# Altium PCB PCB2.PcbDoc (part 3 of 3)
Units mm, origin at the board's own origin, x right, y up, seen from the top; angles counter-clockwise.
Board outline 98.9 x 50 mm, 4 copper layers (Top Copper, Signal Layer 1, Signal Layer 2, Bottom Copper), stack 1.564 mm thick; 154 components, 109 nets, 647 pads, 921 vias.
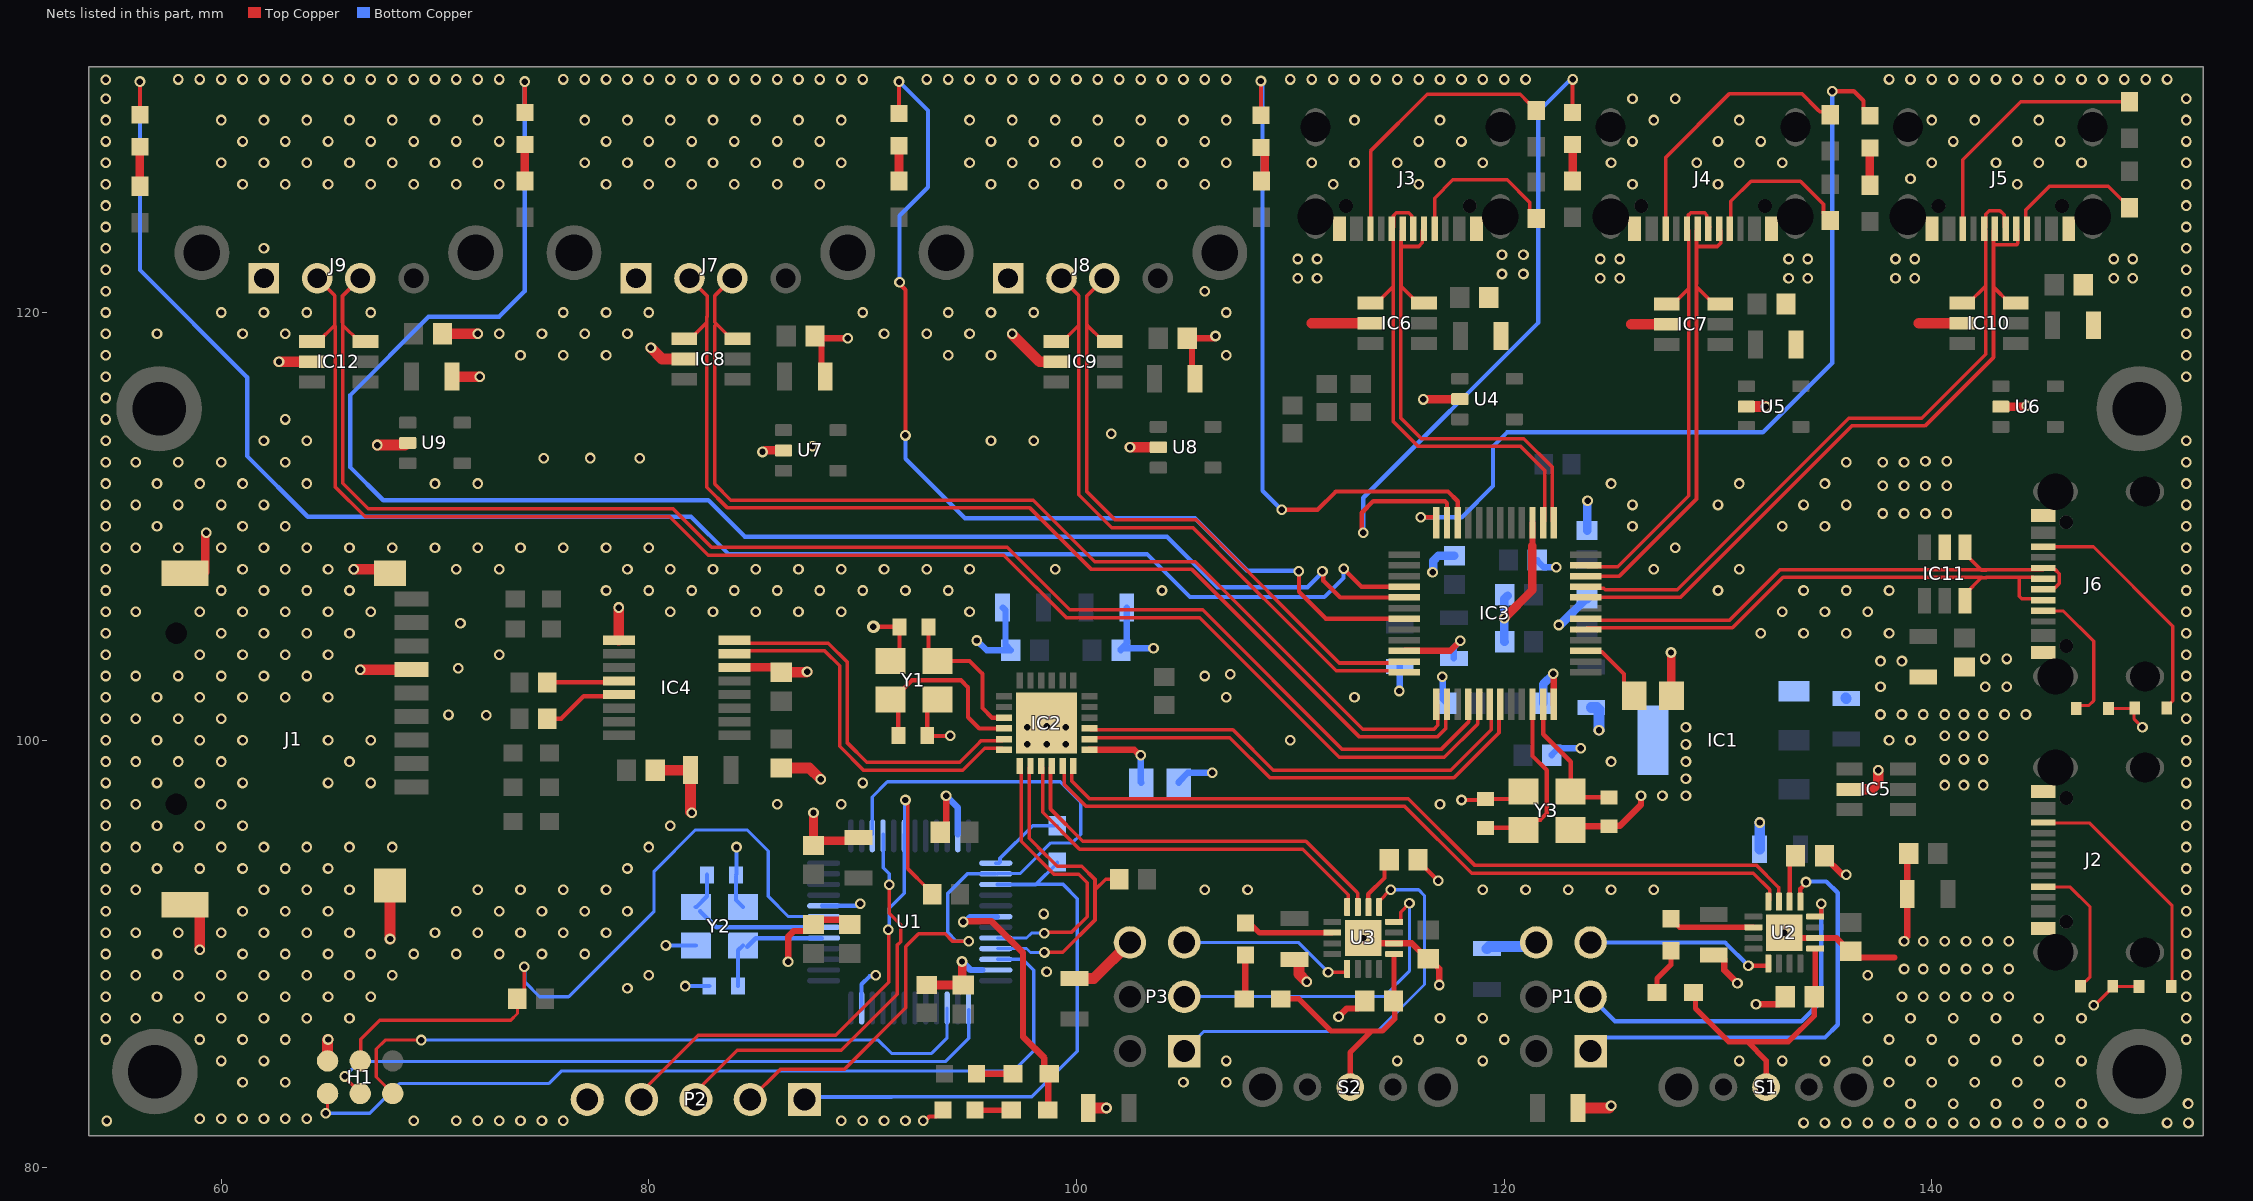
[diagram p4: the nets of this part, all layers, seen from the top]

## Via types
v1: diameter 0.5/0.5/0.5/0.5 (per signal layer), hole 0.3, Top Copper to Bottom Copper, tented both sides, 720 vias
v2: diameter 0.5, hole 0.3, Top Copper to Bottom Copper, tented both sides, 197 vias
v3: diameter 0.5, hole 0.3, Top Copper to Bottom Copper, 3 vias
v4: diameter 0.6/0.6/0.6/0.6 (per signal layer), hole 0.3, Top Copper to Bottom Copper, tented both sides, 1 vias

## Nets (pads, with @x,y where several pads share a name; then routed paths per layer and width w, separated by ;. In a path a pad name is that pad's centre, name@x,y a point inside that pad or via, vN(x,y) a via of type N, cw(c..) or ccw(c..) an arc to the next point about the centre after c; other vN are vias at no path point) (continued)
GND: C1.1 C2.1 C3.1 C4.1 C5.1 C6.1 C7.1 C8.1 C9.1 C10.2 C11.2 C12.1 C13.2 C14.1 C15.2 C16.1 C17.2 C18.1 C19.1 C20.1 C21.1 C22.1 C23.1 C24.1 C25.2 C26.1 C27.1 C28.1 C29.1 C30.1 C31.1 C32.1 C33.1 C34.1 C35.1 C36.2 C37.2 C38.2 C39.2 C40.2 C41.2 C42.2 C43.2 C44.2 C45.1 C46.1 C47.1 C48.1 C49.1 C50.1 C51.1 C52.1 C53.1 C54.1 C55.1 C56.1 C57.1 C58.1 C59.1 C60.1 C61.1 C62.1 D4.2 H1.3 IC1.1 IC1.4 IC2.25 IC3.10 IC3.24 IC3.39 IC4.1 IC4.14 IC5.5 IC6.5 IC7.5 IC8.5 IC9.5 IC10.5 IC11.5 IC12.5 J1.6 J1.G1 J1.G2 J1.G3 J1.G4 J2.A1-B12 J2.B1-A12 J3.A1-B12 J3.B1-A12 J4.A1-B12 J4.B1-A12 J5.A1-B12 J5.B1-A12 J6.A1-B12 J6.B1-A12 J7.1 J8.1 J9.1 P1.6 P2.5 P3.6 R1.2 R7.1 R10.2 R28.1 R33.1 R36.1 R37.1 U1.8 U1.23 U1.35 U1.47 U2.2 U2.17 U3.2 U3.17 U4.2 U5.2 U6.2 U7.2 U8.2 U9.2 Y1.2 Y1.4 Y2.2 Y2.4 Y3.2 Y3.4 | length 169.5
  Top Copper w0.149: v1(147.569,87.6) 147.611,87.6 148.453,88.442 R28.1@148.453,88.492 148.464,88.481 R33.1@149.692,88.481 ; R36.1@148.258,101.481 R37.1@149.572,101.481 ; R37.1@149.448,101.469 149.448,101.011 v1(149.848,100.611)
  Top Copper w0.166: R37.1@149.572,101.481 R37.1@149.593,101.502
  Top Copper w0.2: v4(90.5,105.3) C11.2@91.725,105.3 91.725,104.125 Y1.4@91.3,103.7 ; v1(92.839,82.201) 92.92,82.201 93.119,82.4 93.45,82.4 D4.2@93.75,82.7 ; Y1.2@93.5,101.9 93.018,101.418 C13.2@93.018,100.218 93.036,100.2 v1(94.1,100.2) ; C21.1@115.975,94.4 116.056,94.319 116.056,94.269 116.9,93.425 v1(116.922,93.425) ; v1(118.006,97.2) 119.075,97.2 C30.1@119.125,97.25 120.55,97.25 Y3.4@120.9,97.6
  Top Copper w0.3: v1(86.511,89.64) 86.511,90.236 ; 86.511,90.294 86.511,90.811 86.775,91.075 87.4,91.075 C5.1@87.7,91.375 ; C56.1@87.775,118.9 C56.1@87.875,118.8 ; C5.1@87.932,91.6 C6.1@89.632,91.6 ; C55.1@88.25,117 88.075,117.175 88.075,118.6 C56.1@87.875,118.8 ; v1(89.3,118.8) C56.1@87.875,118.8 ; C7.1@93.625,95.7 93.9,95.975 v1(93.9,97.4) ; C59.1@105.55,116.9 105.4,117.05 105.4,118.575 C60.1@105.175,118.8 106.4,118.8 v1(106.5,118.9) ; v1(112.255,87.068) 112.637,87.45 113.175,87.45 113.475,87.75 C25.2@113.475,87.8 ; v1(113.405,90.75) 113.655,90.5 U3.2@114.85,90.5 115.675,90.5 C24.1@116.4,89.775 ; IC3.10@115.337,104.175 117.475,104.175 v1(117.951,104.651) ; C24.1@116.45,89.775 116.5,89.775 116.969,89.306 v1(116.969,88.552) ; 121.3,109.1 121.325,109.125 IC3.39@121.325,110.163 ; v1(122.3,103.1) 122.325,103.075 IC3.24@122.325,101.687 ; Y3.2@123.1,95.8 123.275,95.975 C31.1@124.9,95.975 124.915,95.99 125.404,95.99 126.4,96.986 v1(126.4,97.4) ; C18.1@129.8,89.95 130.1,89.95 130.3,89.75 130.3,89.239 v1(130.909,88.63) ; v1(131.775,87.654) 132.85,87.654 133.15,87.954 C15.2@133.15,88 ; v1(133.1,91) 133.35,90.75 U2.2@134.545,90.75 135.525,90.75 136.15,90.125 C14.1@136.2,90.125 136.49,89.835 138.248,89.835 ; C12.1@134.975,94.6 134.975,94.55 135.787,93.738 135.962,93.738 v1(136,93.7) ; v1(138.7,90.6) 138.7,90.654 138.85,90.804 C48.1@138.85,92.8 138.85,94.625 C47.1@138.925,94.7
  Top Copper w0.4: J1.G3@59.25,107.85 59.25,109.65 v1(59.3,109.7) ; J1.G2@67.9,108 J1.G2@68.45,107.45 ; IC4.14@84,103.402 C32.1@85.898,103.402 ; v1(85.315,113.479) 85.369,113.479 85.44,113.55 U7.2@86.3,113.55 ; v1(87.7,96.6) C4.1@87.7,95.075 87.925,95.3 89.65,95.3 C3.1@89.8,95.45 ; R7.1@93,88.55 C8.1@94.7,88.55 94.664,88.586 94.664,89.63 v1(94.645,89.649) ; v1(116.209,115.934) 116.218,115.942 117.905,115.942 U4.2@117.919,115.956 ; v1(120,105.7) 121.306,107.006 121.306,109.094 ; v1(127.8,104.1) 127.813,104.088 127.813,102.087 R10.2@127.825,102.075 ; U6.2@143.225,115.6 144.369,115.6 144.414,115.646 v1(144.441,115.646)
  Top Copper w0.5: J1.G4@58.3,92.3 58.65,92.3 59,91.95 v1(59,90.2) ; v1(62.703,117.692) 62.712,117.7 IC12.5@64.25,117.7 ; H1.3@64.976,85 64.976,85.976 v1(65,86) ; v1(66.2,108) J1.G2@67.9,108 ; v1(66.5,103.3) J1.6@68.9,103.3 ; v1(67.3,113.8) 68.6,113.8 68.7,113.9 U9.2@68.725,113.9 ; v1(67.9,90.7) J1.G1@67.9,93.2 ; C62.1@70.35,119 v1(72,119) ; C61.1@70.8,117 v1(72.1,117) ; IC4.1@78.6,104.672 v1(78.6,106.2) ; v1(80.098,118.345) 80.618,117.825 IC8.5@81.65,117.825 ; C46.1@80.3,98.6 C33.1@81.95,98.6 81.95,96.65 v1(82,96.6) ; C45.1@86.2,98.7 87.5,98.7 v1(88.033,98.167) ; C32.1@86.2,103.175 87.375,103.175 v1(87.4,103.2) ; v1@97,118.974 98.274,117.7 IC9.5@99.05,117.7 ; C28.1@99.9,88.85 100.81,88.85 P3.6@102.5,90.54 ; C29.1@100.55,82.8 v1(101.4,82.8) ; v1(102.5,113.7) U8.2@103.825,113.7 ; C27.1@110.2,89.75 110.308,89.75 110.408,89.65 110.408,89.061 v1(110.774,88.695) ; 111,119.5 IC6.5@113.75,119.5 ; C20.1@123.45,82.8 124.9,82.8 v1(125,82.9) ; 125.95,119.45 IC7.5@127.6,119.45 ; U5.2@131.325,115.6 132.231,115.6 v1(132.244,115.586) ; IC5.5@136.15,97.7 137.192,97.7 137.5,98.008 v1(137.5,98.6) ; 139.4,119.5 IC10.5@141.425,119.5
  Bottom Copper w0.2: v1(80.8,90.4) Y2.4@82.2,90.4 ; v1(81.7,88.5) C22.1@82.825,88.5 ; C23.1@84.075,93.613 84.075,92.525 Y2.2@84.4,92.2 ; C23.1@84.075,93.7 84.1,93.725 v1(84.1,95) ; U1.8@88.1,92.25 89.705,92.25 89.805,92.35 v1(89.886,92.35) ; U1.47@89.95,87.4 U1.47@89.95,87.475 89.95,88.584 90.321,88.955 90.559,88.955 v1(90.606,89.001)
  Bottom Copper w0.3: v1(93.9,97.4) 94.45,96.85 U1.23@94.45,95.6 ; v1(94.645,89.649) 95.044,89.25 U1.35@95.6,89.25 ; v1(95.338,104.662) 95.8,104.2 C10.2@96.925,104.2 96.679,104.446 96.679,106.071 C9.1@96.55,106.2 ; C17.2@102.075,104.2 102.175,104.3 v1(103.6,104.3) ; C17.2@102.075,104.25 102.35,104.525 C16.1@102.35,106.2 ; R1.2@104.775,98 104.775,98.044 105.2,98.469 v1(106.347,98.469) ; v1(115.1,102.3) 115.114,102.314 C26.1@115.114,103.448 ; v1(117.111,102.973) 117.118,102.966 117.118,101.932 C36.2@117.325,101.725 ; C34.1@117.65,103.825 117.65,104.35 v1(117.951,104.651) ; C41.2@121.55,108.425 121.55,108.384 121.85,108.084 v1(122.437,108.084) ; C42.2@122.225,99.3 122.225,99.316 122.525,99.616 v1(123.574,99.616)
  Bottom Copper w0.4: v1(116.652,107.851) 116.69,107.889 116.69,108.391 116.928,108.629 117.671,108.629 C43.2@117.675,108.625 ; C38.2@120.025,104.6 120.013,104.613 120.013,105.687 v1(120,105.7) 120.012,105.712 120.012,106.612 C40.2@120.158,106.758 ; C39.2@121.825,101.725 121.825,102.625 v1(122.3,103.1) ; v1(122.546,105.387) 122.584,105.425 122.65,105.425 123.825,106.6 C44.2@123.875,106.6 ; C37.2@123.875,109.8 123.888,109.812 123.888,111.188 v1(123.9,111.2)
  Bottom Copper w0.5: C19.1@119.2,90.25 119.3,90.35 121.31,90.35 P1.6@121.5,90.54 ; C35.1@124.075,101.525 124.334,101.525 124.434,101.425 v1(124.434,100.467) ; C1.1@131.95,94.9 v1(131.95,96.15) ; C2.1@135.979,101.971 C2.1@136,101.95
  other v1: 139,83 141,83 143,83 145,83 147,83 61,84 63,84 105,84 107,84 138,84 140,84 142,84 144,84 146,84 60,85 62,85 107,85 115,85 119,85 131,85 133,85 135,85 137,85 139,85 141,85 143,85 145,85 147,85 59,86 61,86 63,86 116,86 118,86 120,86 138,86 140,86 142,86 144,86 146,86 56,87 58,87 60,87 62,87 64,87 66,87 117,87 119,87 137,87 139,87 141,87 143,87 145,87 147,87 57,88 59,88 61,88 63,88 65,88 67,88 138.6,88 139.6,88 140.6,88 141.6,88 142.6,88 143.6,88 79,88.404 56,89 58,89 60,89 62,89 64,89 66,89 68,89 80,89 137,89 138.7,89.3 139.6,89.3 140.6,89.3 141.6,89.3 142.6,89.3 143.6,89.3 57,90 61,90 63,90 65,90 67,90 69,90 71,90 73,90 75,90 77,90 139.6,90.6 140.6,90.6 141.6,90.6 142.6,90.6 143.6,90.6 56,91 58,91 60,91 62,91 64,91 66,91 70,91 72,91 74,91 76,91 78,91 61,92 63,92 65,92 71,92 73,92 75,92 77,92 79,92 56,93 62,93 64,93 66,93 72,93 74,93 76,93 78,93 106,93 108,93 119,93 121,93 123,93 125,93 127,93 57,94 59,94 61,94 63,94 65,94 79,94 56,95 58,95 60,95 62,95 64,95 66,95 68,95 80,95 57,96 59,96 61,96 81,96 56,97 60,97 86,97 89,97 117,97 127.4,97.4 128.5,97.4 140.6,97.9 141.5,97.9 142.4,97.9 57,98 59,98 61,98 65,98 67,98 90,98 128.5,98.2 56,99 58,99 60,99 66,99 125,99 128.5,99 140.6,99.1 141.5,99.1 142.4,99.1 97.7,99.8 98.6,99.8 99.5,99.8 128.5,99.8 57,100 59,100 61,100 65,100 67,100 110,100 138,100 139,100 140.6,100.2 141.5,100.2 142.4,100.2 97.7,100.6 99.5,100.6 128.5,100.6 98.607,100.646 56,101 58,101 60,101 70.63,101.18 72.395,101.169 137.6,101.2 138.6,101.2 139.6,101.2 140.6,101.2 141.5,101.2 142.4,101.2 143.4,101.2 144.4,101.2 57,102 59,102 61,102 63,102 65,102 107,102 113,102 137.6,102.5 142.5,102.5 143.5,102.5 56,103 58,103 60,103 62,103 64,103 106,103 107.194,103.086 71.093,103.37 137.6,103.7 138.6,103.7 142.5,103.8 143.5,103.8 59,104 61,104 63,104 65,104 73,104 60,105 62,105 64,105 66,105 132,105 134,105 136,105 138,105 71.188,105.47 56,106 59,106 61,106 63,106 65,106 67,106 81,106 83,106 85,106 87,106 89,106 95,106 133,106 135,106 137,106 60,107 62,107 64,107 66,107 78,107 80,107 82,107 84,107 86,107 88,107 90,107 92,107 94,107 104,107 130,107 134,107 136,107 138,107 61,108 63,108 65,108 71,108 73,108 79,108 81,108 83,108 85,108 87,108 89,108 91,108 93,108 95,108 99,108 127,108 131,108 56,109 58,109 60,109 62,109 64,109 66,109 68,109 70,109 72,109 74,109 76,109 78,109 80,109 128,109 57,110 61,110 63,110 126,110 133,110 135,110 137.7,110.6 138.7,110.6 139.7,110.6 140.7,110.6 56,111 58,111 60,111 62,111 126,111 130,111 134,111 136,111 137.7,111.9 138.7,111.9 139.7,111.9 140.7,111.9 57,112 59,112 61,112 64,112 70,112 72,112 125,112 131,112 135,112 56,113 58,113 60,113 63,113 136,113 137.7,113 138.7,113 139.7,113.046 140.7,113.046 75.084,113.182 77.254,113.191 79.576,113.182 87.652,113.744 62,114 64,114 96,114 98,114 101.624,114.322 63,115 74,118 76,118 78,118 94,118 96,118 107,118 57,119 61,119 63,119 73,119 75,119 77,119 79,119 91,119 93,119 95,119 97,119 60,120 62,120 64,120 67,120 76,120 78,120 80,120 90,120 94,120 96,120 98,120 107,120 106,121 110.35,121.6 111.25,121.6 124.5,121.6 125.4,121.6 133.3,121.6 134.2,121.6 138.3,121.6 139.2,121.6 148.5,121.6 149.4,121.6 119.9,121.8 120.9,121.8 110.35,122.5 111.25,122.5 124.5,122.5 125.4,122.5 133.3,122.5 134.2,122.5 138.3,122.5 139.2,122.5 148.5,122.5 149.4,122.5 119.9,122.7 120.9,122.7 62,123 61,126 63,126 65,126 67,126 69,126 71,126 73,126 78,126 80,126 82,126 84,126 86,126 88,126 96,126 98,126 100,126 102,126 104,126 106,126 112,126 116,126 126,126 130,126 144,126 139,126.25 60,127 62,127 64,127 66,127 68,127 70,127 72,127 77,127 79,127 81,127 83,127 85,127 87,127 89,127 95,127 97,127 99,127 101,127 103,127 105,127 107,127 111,127 113,127 115,127 117,127 119,127 125,127 129,127 131,127 133,127 140,127 143,127 145,127 147,127 61,128 63,128 65,128 67,128 69,128 71,128 73,128 78,128 80,128 82,128 84,128 86,128 88,128 96,128 98,128 100,128 102,128 104,128 106,128 116,128 118,128 126,128 130,128 132,128 141,128 144,128 146,128 60,129 62,129 64,129 66,129 68,129 70,129 72,129 77,129 79,129 81,129 83,129 85,129 87,129 89,129 95,129 97,129 99,129 101,129 103,129 105,129 107,129 113,129 117,129 127,129 131,129 140,129 142,129 145,129 126,130 128,130
  other v2: 134,82.1 135,82.1 136,82.1 137,82.1 138,82.1 139,82.1 140,82.1 141,82.1 142,82.1 143,82.1 144,82.1 145,82.1 146,82.1 147,82.1 148,82.1 151,82.1 152,82.1 54.651,82.194 69,82.2 71,82.2 72,82.2 73,82.2 74,82.2 75,82.2 76,82.2 89,82.2 90,82.2 91,82.2 92,82.2 59,82.3 60,82.3 61,82.3 62,82.3 63,82.3 64,82.3 151.982,83.005 54.6,86 151.9,86 54.6,87 151.9,87 54.6,88 151.9,88 54.6,89 151.9,89 54.6,90 151.9,90 54.6,91 151.9,91 54.6,92 151.9,92 54.6,93 151.9,93 54.6,94 151.9,94 54.6,95 151.9,95 54.6,96 151.9,96 54.6,97 151.9,97 54.6,98 151.9,98 54.6,99 151.9,99 54.6,100 151.9,100 54.6,101 151.9,101 54.6,102 151.9,102 54.6,103 151.9,103 54.6,104 151.9,104 54.6,105 151.9,105 54.6,106 151.9,106 54.6,107 151.9,107 54.6,108 151.9,108 54.6,109 151.9,109 54.6,110 151.9,110 54.6,111 151.9,111 54.6,112 151.9,112 54.6,113 151.9,113 54.6,114 151.9,114 54.6,115 54.6,116 54.6,117 151.9,117 54.6,118 151.9,118 54.6,119 151.9,119 54.6,120 151.9,120 54.6,121 151.9,121 54.6,122 151.9,122 54.6,123 151.9,123 54.6,124 151.9,124 54.6,125 151.9,125 54.6,126 151.9,126 54.6,127 151.9,127 54.6,128 151.9,128 54.6,129 151.9,129 54.6,130 151.9,130 54.603,130.89 58,130.9 59,130.9 60,130.9 61,130.9 62,130.9 63,130.9 64,130.9 65,130.9 66,130.9 67,130.9 68,130.9 69,130.9 70,130.9 71,130.9 72,130.9 73,130.9 76,130.9 77,130.9 78,130.9 79,130.9 80,130.9 81,130.9 82,130.9 83,130.9 84,130.9 85,130.9 86,130.9 87,130.9 88,130.9 89,130.9 90,130.9 93,130.9 94,130.9 95,130.9 96,130.9 97,130.9 98,130.9 99,130.9 100,130.9 101,130.9 102,130.9 103,130.9 104,130.9 105,130.9 106,130.9 107,130.9 110,130.9 111,130.9 112,130.9 113,130.9 114,130.9 115,130.9 116,130.9 117,130.9 118,130.9 119,130.9 120,130.9 121,130.9 138,130.9 139,130.9 140,130.9 141,130.9 142,130.9 143,130.9 144,130.9 145,130.9 146,130.9 147,130.9 148,130.9 149,130.9 150,130.9 151,130.9
  other v3: 98.6,89.175 98.475,91.875
LED_P2: D10.2 IC3.4 | length 79.2
  Top Copper w0.2: D10.2@56.2,129.25 v1(56.2,130.8) ; v1(112.5,108.021) 112.5,108 113.325,107.175 IC3.4@115.337,107.175
  Bottom Copper w0.2: v1(56.2,130.8) 56.2,121.988 61.216,116.972 61.216,113.284 64.049,110.451 81.975,110.451 83.726,108.7 103.3,108.7 105.31,106.69 111.59,106.69 112.482,107.582 112.482,108.003 v1(112.5,108.021)
LED_P3: D9.2 IC3.5 | length 77.5
  Top Copper w0.2: D9.2@74.2,129.35 v1(74.2,130.8) ; v1(111.5,107.9) 111.539,107.861 111.539,107.461 112.332,106.668 IC3.5@115.33,106.668
  Bottom Copper w0.2: v1(74.2,130.8) 74.2,121 73,119.8 69.7,119.8 66.042,116.142 66.042,112.758 67.584,111.216 82.784,111.216 84.49,109.51 104.235,109.51 106.596,107.149 110.8,107.149 111.5,107.849 v1(111.5,107.9)
LED_P4: D8.2 IC3.7 | length 47.4
  Top Copper w0.2: D8.2@91.7,129.3 v1(91.7,130.8) ; v1(91.725,121.41) 91.725,121.339 92,121.064 v1(92,114.25) ; v1(110.4,107.9) 110.4,106.937 111.662,105.675 IC3.7@115.337,105.675
  Bottom Copper w0.2: v1(91.7,130.8) 93.055,129.445 93.055,125.856 91.725,124.526 v1(91.725,121.41) ; v1(92,114.25) 92,113.157 94.78,110.376 105.537,110.376 107.988,107.925 110.375,107.925 v1(110.4,107.9)
LED_P5: D7.2 IC3.48 | length 39.4
  Top Copper w0.2: v1(116.1,110.419) 116.775,110.419 116.825,110.369 IC3.48@116.825,110.163 ; v1(135.342,130.346) 136.354,130.346 136.8,129.9 136.8,129.5 D7.2@137.1,129.2
  Bottom Copper w0.2: v1(116.1,110.419) 118.013,110.419 119.476,111.883 119.476,113.74 120.131,114.395 132.095,114.395 135.342,117.642 v1(135.342,130.346)
LED_P6: D6.2 IC3.47 | length 33
  Top Copper w0.2: v1(113.413,109.694) 113.337,109.77 113.337,110.638 113.871,111.172 117.228,111.172 117.325,111.075 IC3.47@117.325,110.163 ; D6.2@123.2,129.35 v1(123.2,130.9)
  Bottom Copper w0.2: v1(113.413,109.694) 113.413,111.339 121.6,119.526 121.6,129.4 123.1,130.9 v1(123.2,130.9)
LED_P7: D5.2 IC3.46 | length 31.7
  Top Copper w0.2: D5.2@108.625,129.225 v1(108.625,130.825) ; v1(109.592,110.773) 111.273,110.773 112.129,111.629 117.371,111.629 117.825,111.175 IC3.46@117.825,110.163
  Bottom Copper w0.2: v1@108.7,130.7 108.7,111.665 v1(109.592,110.773)
NetC12_2: C12.2 U2.6 | length 2.3
  Top Copper w0.2: U2.6@133.35,92.445 133.35,94.325 C12.2@133.625,94.6
NetC21_2: C21.2 U3.6 | length 2.6
  Top Copper w0.2: U3.6@113.644,92.206 113.644,92.798 114.4,93.554 114.4,94.175 C21.2@114.625,94.4
NetD1_1: D1.1 R2.1 | length 2.2
  Top Copper w0.25: R2.1@127.15,88.2 127.15,88.85 127.8,89.5 D1.1@127.8,90.15
NetD1_2: D1.2 U2.10 | length 4
  Top Copper w0.25: D1.2@127.8,91.65 128.2,91.25 U2.10@131.655,91.25
NetD2_1: D2.1 R9.1 | length 2.1
  Top Copper w0.3: R9.1@107.85,87.9 107.9,87.95 D2.1@107.9,89.95
NetD2_2: D2.2 U3.10 | length 4
  Top Copper w0.25: D2.2@108.1,91.45 108.562,90.988 U3.10@111.948,90.988
NetD3_2: D3.2 R11.2 | length 1.7
  Top Copper w0.3: D3.2@95.325,84.4 R11.2@97.025,84.4
NetD4_1: D4.1 R13.2 | length 1.7
  Top Copper w0.25: D4.1@95.1,82.7 R13.2@96.85,82.7
NetD5_1: D5.1 R14.1 | length 1.7
  Top Copper w0.4: R14.1@108.8,126.15 D5.1@108.8,127.8
NetD6_1: D6.1 R15.1 | length 1.7
  Top Copper w0.4: R15.1@123.2,126.15 D6.1@123.2,127.85
NetD7_1: D7.1 R16.1 | length 1.7
  Top Copper w0.4: R16.1@137.1,125.95 D7.1@137.1,127.7
NetD8_1: D8.1 R17.1 | length 1.7
  Top Copper w0.4: R17.1@91.7,126.15 D8.1@91.7,127.8
NetD9_1: D9.1 R18.1 | length 1.7
  Top Copper w0.4: R18.1@74.2,126.15 D9.1@74.2,127.85
NetD10_1: D10.1 R19.1 | length 1.8
  Top Copper w0.4: R19.1@56.2,125.9 D10.1@56.2,127.75
NetIC2_13: IC2.13 R1.1 | length 3.8
  Top Copper w0.3: IC2.13@100.6,99.55 102.696,99.55 102.946,99.3 v1(103,99.3)
  Bottom Copper w0.3: v1(103,99.3) 103,98.025 R1.1@103.025,98
NetIC3_27: IC3.27 R10.1 | length 3.5
  Top Copper w0.2: IC3.27@123.813,104.175 123.863,104.125 124.573,104.125 125.6,103.098 125.6,102.55 R10.1@126.075,102.075
NetIC4_4: IC4.4 R23.1 | length 3.4
  Top Copper w0.2: R23.1@75.258,102.708 78.54,102.708 IC4.4@78.6,102.768
NetIC4_5: IC4.5 R25.1 | length 3.8
  Top Copper w0.2: R25.1@75.25,101 75.9,101 76.95,102.05 78.518,102.05 IC4.5@78.6,102.132
NetJ2_A5: J2.A5 R28.2 | length 6.8
  Top Copper w0.149: J2.A5@144.845,93.13 146.47,93.13 147.4,92.2 147.4,88.939 R28.2@146.953,88.492
NetJ2_B5: J2.B5 R33.2 | length 11.8
  Top Copper w0.149: J2.B5@144.845,96.13 147.37,96.13 151.236,92.264 151.236,88.524 R33.2@151.192,88.481
NetR3_2: R3.2 U1.25 | length 3.7
  Bottom Copper w0.166: U1.25@96.225,94.25 96.384,94.25 96.423,94.289 96.423,94.472 97.95,96 R3.2@99.1,96
NRST: H1.2 R8.1 U1.7 | length 33.3
  Top Copper w0.15: H1.2@66.5,85 66.524,85.024 66.524,86.014 67.409,86.9 73.541,86.9 73.857,87.217 R8.1@73.857,87.907 ; R8.1@73.85,87.9 74.175,88.225 74.175,89.394 v1(74.171,89.398)
  Bottom Copper w0.15: v1(74.171,89.398) 74.215,89.354 74.215,88.673 74.888,88 76.25,88 80.246,91.996 80.246,93.871 82.175,95.8 84.6,95.8 85.582,94.818 85.582,92.699 86.53,91.75 U1.7@88.1,91.75
P1_D_N: IC2.15 IC3.18 | length 21.6
  Top Copper w0.166: IC2.15@100.6,100.55 100.667,100.483 107.317,100.483 109.2,98.6 117.5,98.6 119.392,100.492 119.392,100.958 119.392,101.62 IC3.18@119.325,101.687
P1_D_P: IC2.14 IC3.19 | length 22.2
  Top Copper w0.166: IC2.14@100.6,100.05 100.667,100.117 100.967,100.117 107.166,100.117 109.049,98.234 117.651,98.234 119.758,100.341 119.758,101.62 IC3.19@119.825,101.687
P2_D_N: IC3.16 IC12.3 J9.3 | length 70.5
  Top Copper w0.166: 65.691,119.409 65.691,119.528 65.675,119.545 65.675,119.664 65.675,120.208 65.675,120.775 J9.3@66.5,121.6 ; IC12.3@66.75,118.65 66.45,118.65 65.691,119.409 65.691,112.007 66.882,110.817 81.132,110.817 82.932,109.017 96.757,109.017 99.682,106.092 105.908,106.092 112.434,99.566 117.048,99.566 118.335,100.852 118.335,101.677 IC3.16@118.325,101.687
P2_D_P: IC3.17 IC12.4 J9.2 | length 71.7
  Top Copper w0.166: IC12.4@64.25,118.65 64.55,118.65 65.286,119.386 ; J9.2@64.5,121.6 65.309,120.791 65.309,120.056 65.309,119.601 65.309,119.409 65.286,119.386 ; IC3.17@118.825,101.687 118.758,101.62 118.758,100.758 117.2,99.2 112.282,99.2 105.757,105.726 99.53,105.726 96.605,108.651 82.78,108.651 80.98,110.451 66.73,110.451 65.325,111.856 65.325,119.347 65.286,119.386
P3_D_N: IC3.13 IC8.3 J7.3 | length 51
  Top Copper w0.166: J7.3@83.9,121.6 83.091,120.791 83.091,120.112 83.091,119.646 83.085,119.64 83.085,119.54 83.158,119.467 ; IC8.3@84.15,118.775 83.85,118.775 83.158,119.467 ; IC3.13@116.825,101.687 116.892,101.62 116.892,100.69 116.718,100.516 113.384,100.516 105.55,108.35 100.85,108.35 97.975,111.225 83.833,111.225 83.075,111.983 83.075,119.384 83.158,119.467
P3_D_P: IC3.14 IC8.4 J7.2 | length 52.2
  Top Copper w0.166: IC8.4@81.65,118.775 81.95,118.775 82.709,119.534 ; J7.2@81.9,121.6 82.725,120.775 82.725,120.264 82.725,119.799 82.717,119.791 82.717,119.544 82.717,119.542 82.709,119.534 ; IC3.14@117.325,101.687 117.258,101.62 117.258,100.539 116.869,100.15 113.233,100.15 105.398,107.984 100.698,107.984 97.823,110.859 83.681,110.859 82.709,111.831 82.709,119.534
P4_D_N: IC3.11 IC9.3 J8.3 | length 29.9
  Top Copper w0.166: 100.491,119.425 100.491,119.409 101.25,118.65 IC9.3@101.55,118.65 ; J8.3@101.3,121.6 100.475,120.775 100.475,120.208 100.475,119.409 100.475,111.625 101.8,110.3 105.6,110.3 112.292,103.608 115.27,103.608 IC3.11@115.337,103.675
P4_D_P: IC3.12 IC9.4 J8.2 | length 30.5
  Top Copper w0.166: IC9.4@99.05,118.65 99.35,118.65 100.109,119.409 ; J8.2@99.3,121.6 100.109,120.791 100.109,120.056 100.109,119.425 100.109,119.409 ; IC3.12@115.337,103.175 115.27,103.242 112.14,103.242 105.448,109.934 101.648,109.934 100.109,111.474 100.109,119.409
P5_CC1: J5.A5 R35.1 | length 6.7
  Top Copper w0.166: J5.A5@144.45,123.91 144.4,123.96 144.4,124.8 145.5,125.9 148.25,125.9 148.883,125.267 148.933,125.267 149.25,124.95 R35.1@149.25,124.9
P5_CC2: J5.B5 R34.1 | length 12.2
  Top Copper w0.166: J5.B5@141.45,123.91 141.45,127.15 144.15,129.85 R34.1@149.25,129.85
P5_D_N: IC3.32 IC10.3 J5.A7 J5.B7 | length 33
  Top Copper w0.166: IC3.32@123.813,106.675 123.814,106.674 125.911,106.674 128.24,106.674 136.259,114.694 139.678,114.694 142.883,117.898 142.883,120.94 142.883,121.192 ; 142.903,123.158 143.956,123.158 144.025,123.228 144.025,123.835 J5.B7@143.95,123.91 ; J5.A7@142.95,123.91 142.883,123.843 142.883,123.158 142.883,121.192 ; IC10.3@143.925,120.45 143.625,120.45 142.883,121.192
P5_D_P: IC3.33 IC10.4 J5.A6 J5.B6 | length 33
  Top Copper w0.166: IC3.33@123.813,107.175 123.88,107.108 124.651,107.108 124.719,107.04 126.063,107.04 128.088,107.04 136.108,115.059 139.527,115.059 142.517,118.05 142.517,121.092 142.517,121.242 ; IC10.4@141.425,120.45 141.725,120.45 142.517,121.242 ; J5.A6@143.45,123.91 143.383,123.977 143.383,124.566 143.185,124.763 142.688,124.763 142.517,124.592 142.517,123.977 J5.B6@142.45,123.91 142.517,123.843 142.517,123.343 142.517,121.242
P6_CC1: J4.A5 R32.1 | length 7.4
  Top Copper w0.166: J4.A5@130.55,123.91 130.6,123.96 130.6,125.2 131.546,126.146 133.854,126.146 134.933,125.067 134.933,124.617 R32.1@135.25,124.3
P6_CC2: J4.B5 R31.1 | length 12.7
  Top Copper w0.166: J4.B5@127.55,123.91 127.55,127.25 130.54,130.24 133.91,130.24 134.678,129.472 134.753,129.397 135.103,129.397 R31.1@135.25,129.25
P6_D_N: IC3.34 IC7.3 J4.A7 J4.B7 | length 22.6
  Top Copper w0.166: IC3.34@123.813,107.675 125.392,107.675 128.994,111.277 128.994,121.2 ; 128.991,121.351 128.991,121.209 128.997,121.203 129.8,120.4 IC7.3@130.1,120.4 ; 128.994,121.351 128.994,123.086 ; J4.A7@129.05,123.91 128.994,123.854 128.994,123.086 ; J4.B7@130.05,123.91 130.118,123.842 130.118,123.241 129.963,123.086 128.994,123.086
P6_D_P: IC3.35 IC7.4 J4.A6 J4.B6 | length 22.4
  Top Copper w0.166: IC3.35@123.813,108.175 123.88,108.108 124.542,108.108 125.308,108.108 128.625,111.425 128.625,121.125 ; IC7.4@127.6,120.4 127.9,120.4 128.625,121.125 ; J4.A6@129.55,123.91 129.624,123.984 129.477,124.131 129.477,124.555 129.373,124.66 128.717,124.66 128.618,124.56 128.618,123.978 J4.B6@128.55,123.91 128.625,123.835 128.625,122.625 128.625,121.351 128.625,121.125
P7_CC1: J3.A5 R30.1 | length 7.5
  Top Copper w0.166: J3.A5@116.75,123.91 116.75,125.35 117.6,126.2 120.139,126.2 121.187,125.152 121.187,124.713 R30.1@121.5,124.4
P7_CC2: J3.B5 R29.1 | length 12.8
  Top Copper w0.166: J3.B5@113.75,123.91 113.75,127.55 116.4,130.2 120.75,130.2 121.133,129.817 121.183,129.817 121.5,129.5 R29.1@121.5,129.45
P7_D_N: IC3.37 IC6.3 J3.A7 J3.B7 | length 22.8
  Top Copper w0.166: 115.175,123.086 116.004,123.086 116.175,123.257 116.175,123.835 J3.B7@116.25,123.91 ; 115.201,121.199 115.95,120.45 IC6.3@116.25,120.45 ; J3.A7@115.325,123.835 J3.A7@115.25,123.91 115.183,123.843 115.183,123.352 115.175,123.343 115.175,123.13 115.175,121.225 115.169,121.22 115.169,121.199 115.169,115.063 116.132,114.1 120.922,114.1 122.258,112.765 122.258,110.892 122.258,110.23 IC3.37@122.325,110.163
P7_D_P: IC3.38 IC6.4 J3.A6 J3.B6 | length 23.2
  Top Copper w0.166: IC6.4@113.75,120.45 114.05,120.45 114.799,121.199 114.801,121.196 ; J3.A6@115.75,123.91 115.675,123.985 115.675,124.529 115.544,124.66 114.956,124.66 114.825,124.529 114.825,123.985 J3.B6@114.75,123.91 114.809,123.851 114.809,122.978 114.809,121.377 114.804,121.372 114.804,121.199 114.804,121.196 114.804,121.194 114.804,114.912 115.981,113.735 120.771,113.735 121.892,112.613 121.892,110.23 IC3.38@121.825,110.163
P8_D_N: IC2.11 U2.8 | length 36.5
  Top Copper w0.166: IC2.11@99.35,98.8 99.417,98.733 99.417,97.939 100.456,96.9 115.358,96.9 118.483,93.775 131.655,93.775 132.415,93.015 132.415,92.51 U2.8@132.35,92.445
P8_D_P: IC2.12 U2.7 | length 36.5
  Top Copper w0.166: IC2.12@99.85,98.8 99.783,98.733 99.783,98.091 100.608,97.266 115.51,97.266 118.635,94.141 131.807,94.141 132.775,93.173 132.85,93.098 U2.7@132.85,92.445
P9_D_N: IC2.9 U3.8 | length 18.7
  Top Copper w0.166: IC2.9@98.35,98.8 98.417,98.733 98.417,96.633 100.143,94.906 110.579,94.906 112.713,92.772 112.713,92.253 U3.8@112.655,92.195
P9_D_P: IC2.10 U3.7 | length 18.7
  Top Copper w0.166: IC2.10@98.85,98.8 98.783,98.733 98.783,96.784 100.295,95.272 110.731,95.272 113.097,92.906 113.155,92.848 U3.7@113.155,92.195
P10_D_N: IC2.7 U1.32 | length 13.6
  Top Copper w0.166: IC2.7@97.35,98.8 97.417,98.733 97.417,95.265 98.948,93.734 100.1,93.734 100.5,93.334 100.5,91.75 99.77,91.02 98.531,91.02 v1(98.485,90.973)
  Bottom Copper w0.138: U1.32@96.3,90.75 96.305,90.745 97.665,90.745 97.894,90.973 v1(98.485,90.973)
P10_D_P: IC2.8 R39.1 U1.33 | length 15.8
  Top Copper w0.166: IC2.8@97.85,98.8 97.783,98.733 97.783,95.417 98.6,94.6 98.729,94.471 99.1,94.1 100.252,94.1 100.866,93.486 100.866,93 ; v1(98.501,90.074) 98.507,90.08 99.355,90.08 100.866,91.591 100.866,91.82 100.866,93 ; R39.1@102,93.5 101.366,93.5 100.866,93
  Bottom Copper w0.138: U1.33@96.3,90.25 96.305,90.255 97.665,90.255 97.847,90.074 v1(98.501,90.074)
P11_D_N: IC2.5 IC4.16 | length 17.6
  Top Copper w0.166: IC4.16@84,104.672 84.134,104.538 88.386,104.538 89.287,103.637 89.287,99.865 90.187,98.964 94.533,98.964 95.337,99.769 95.552,99.983 96.533,99.983 IC2.5@96.6,100.05
P11_D_P: IC2.6 IC4.15 | length 17.6
  Top Copper w0.166: IC4.15@84,104.038 84.134,104.172 88.234,104.172 88.921,103.485 88.921,99.713 90.036,98.598 94.685,98.598 95.703,99.617 96.533,99.617 IC2.6@96.6,99.55
RTS1: P1.5 U2.13 | length 8.8
  Top Copper w0.2: v1(131.422,89.45) 132.31,89.45 132.35,89.49 U2.13@132.35,89.555
  Bottom Copper w0.2: P1.5@124.04,90.54 130.332,90.54 v1(131.422,89.45)
RTS2: P3.5 U3.13 | length 8.3
  Top Copper w0.15: v1(111.765,89.143) 112.59,89.143 112.655,89.208 U3.13@112.655,89.305
  Bottom Copper w0.15: P3.5@105.04,90.54 110.367,90.54 v1(111.765,89.143)
RX1: P1.1 U2.5 | length 21
  Top Copper w0.2: U2.5@133.85,92.445 133.85,93.054 134.117,93.321 v1(134.117,93.363)
  Bottom Copper w0.2: P1.1@124.04,85.46 124.676,86.096 134.999,86.096 135.596,86.692 135.596,92.861 135.062,93.395 134.149,93.395 v1(134.117,93.363)
RX2: P3.1 U3.5 | length 19.4
  Top Copper w0.15: U3.5@114.155,92.195 114.155,92.475 114.68,93 v1(114.7,93)
  Bottom Copper w0.15: P3.1@105.04,85.46 105.961,86.381 114.081,86.381 116.274,88.574 116.274,92.726 116,93 v1(114.7,93)
STLINK_LED: R11.1 R13.1 U1.30 | length 13
  Top Copper w0.3: v1(94.7,91.5) 94.738,91.538 96.023,91.538 97.497,90.065 97.497,86.136 98.5,85.132 98.5,84.625 R11.1@98.725,84.4 98.675,84.35 R13.1@98.675,82.7
  Bottom Copper w0.25: v1(94.7,91.5) 94.768,91.5 95.018,91.75 U1.30@96.3,91.75
STLINK_NRST: P2.4 R12.1 U1.18 | length 27.4
  Top Copper w0.166: P2.4@79.735,83.635 82.306,86.206 88.739,86.206 91.218,88.685 91.218,91.101 v1(91.191,91.128) ; v1(92,97.2) 92.1,97.1 92.1,94 93.05,93.05 93.05,93 R12.1@93.25,92.8
  Bottom Copper w0.166: v1(91.191,91.128) 91.243,91.18 91.243,92.132 91.95,92.839 91.95,95.6 91.975,95.625 91.975,97.175 v1(92,97.2)
STLINK_SWCLK: P2.2 U1.15 U1.26 | length 39.2
  Top Copper w0.166: P2.2@84.74,83.2 86.14,84.6 89.132,84.6 92.019,87.487 92.019,90.348 92.614,90.943 93.857,90.943 94.2,90.6 94.966,90.6 v1(94.968,90.598)
  Bottom Copper w0.15: U1.15@90.45,95.6 90.45,97.343 91.158,98.05 99.25,98.05 100.198,97.102 100.198,95.588 99.806,95.195 98.801,95.195 97.371,93.766 96.316,93.766 U1.26@96.3,93.75
  Bottom Copper w0.166: v1(94.968,90.598) 94.963,90.602 94.381,90.602 93.979,91.005 93.979,92.828 94.901,93.751 U1.26@96.224,93.751
STLINK_SWDIO: P2.1 R3.1 U1.27 | length 26.3
  Bottom Copper w0.166: P2.1@87.28,83.2 87.393,83.313 91.353,83.313 91.359,83.319 97.902,83.319 100.036,85.453 100.036,92.591 99.37,93.257 98.107,93.257 ; U1.27@96.3,93.25 98.1,93.25 98.107,93.257 ; R3.1@99.1,94.3 99.1,94.25 98.107,93.257
STLINK_SWO: P2.3 U1.16 | length 19.6
  Top Copper w0.166: P2.3@82.6,83.1 82.469,83.231 82.469,83.836 84.129,85.496 88.995,85.496 91.621,88.123 91.621,90.421 91.778,90.578 91.778,91.371 91.241,91.908 v1(91.241,93.238)
  Bottom Copper w0.166: U1.16@90.958,95.592 90.958,94.03 91.241,93.747 v1(91.241,93.238)
SWCLK: H1.5 U1.37 | length 32.4
  Top Copper w0.15: v1(65.775,84.275) 65.775,84.238 66.5,83.513 H1.5@66.5,83.476
  Bottom Copper w0.15: v1(65.775,84.275) 66.468,84.968 93.868,84.968 94.959,86.059 U1.37@94.959,87.391
SWDIO: H1.4 U1.34 | length 40.9
  Top Copper w0.15: v1(64.897,82.556) 64.897,82.651 64.975,82.73 H1.4@64.975,83.475
  Bottom Copper w0.15: v1(64.897,82.556) 66.953,82.556 68.334,83.937 75.312,83.937 75.9,84.525 97.051,84.525 98,85.474 98,89.244 97.494,89.75 U1.34@96.3,89.75
SWO: H1.6 U1.39 | length 31.2
  Top Copper w0.15: H1.6@68.024,83.476 67.251,84.249 67.251,85.559 67.667,85.975 v3(69.35,85.975)
  Bottom Copper w0.15: v3(69.35,85.975) 90.725,85.975 91.35,85.35 93.225,85.35 93.95,86.075 U1.39@93.95,87.475
TX1: P1.3 U2.4 | length 17.1
  Top Copper w0.2: U2.4@134.545,91.75 134.79,91.75 134.83,91.79 v1(134.83,92.346)
  Bottom Copper w0.2: P1.3@124.04,88 125.183,86.857 133.897,86.857 134.83,87.79 v1(134.83,92.346)
TX2: P3.3 U3.4 | length 15.5
  Top Copper w0.15: U3.4@114.85,91.5 115.095,91.5 115.16,91.565 115.16,91.96 v1(115.569,92.369)
  Bottom Copper w0.15: P3.3@105.04,88 105.053,88.013 114.382,88.013 115.569,89.201 v1(115.569,92.369)
UP_CC1: J6.A5 R36.2 | length 7.1
  Top Copper w0.149: J6.A5@144.844,106.042 146.154,106.042 147.57,104.626 147.57,101.85 147.342,101.622 146.899,101.622 R36.2@146.758,101.481
UP_CC2: J6.B5 R37.2 | length 11.9
  Top Copper w0.149: J6.B5@144.844,109.042 147.558,109.042 151.266,105.334 151.266,101.837 150.982,101.553 R37.2@150.982,101.503
UP_D_N: IC3.29 IC11.3 J6.A7 J6.B7 | length 25.2
  Top Copper w0.166: IC3.29@123.813,105.175 123.888,105.25 130.675,105.25 133.043,107.618 142.325,107.618 ; IC11.3@141.55,106.525 141.55,106.825 142.317,107.592 142.55,107.592 ; 142.55,107.618 143.655,107.618 ; 143.618,107.618 143.655,107.618 ; J6.B7@144.844,106.542 144.77,106.617 144.2,106.617 144.094,106.723 144.094,107.598 144.075,107.618 ; J6.A7@144.844,107.542 144.769,107.618 144.274,107.618 144.075,107.618 ; 143.655,107.618 144.075,107.618
UP_D_P: IC3.30 IC11.4 J6.A6 J6.B6 | length 26.3
  Top Copper w0.166: IC3.30@123.813,105.675 123.888,105.6 124.546,105.6 130.531,105.6 132.898,107.967 142.325,107.967 ; IC11.4@141.55,109.025 141.55,108.725 142.317,107.958 142.55,107.958 ; 142.55,107.967 J6.B6@144.769,107.967 ; J6.A6@144.844,107.042 144.919,107.118 145.746,107.118 145.957,107.329 145.957,107.783 145.757,107.983 145.277,107.983 J6.B6@145.21,108.05 ; J6.B6@144.844,107.967 J6.B6@145.21,107.967
VIO1: C15.1 R2.2 S1.2 U2.1 | length 13.1
  Top Copper w0.25: R2.2@128.85,88.2 128.946,88.104 128.946,87.454 130.5,85.9 131.373,85.9 ; S1.2@132.25,83.775 132.25,85.023 131.373,85.9 ; U2.1@134.545,90.25 134.545,88.045 C15.1@134.5,88 134.5,87.1 133.3,85.9 131.373,85.9
VIO2: C25.1 R9.2 S2.2 U3.1 | length 12.1
  Top Copper w0.25: R9.2@109.75,87.9 110.4,87.9 111.904,86.396 113.8,86.396 ; S2.2@112.8,83.8 112.8,85.396 113.8,86.396 ; U3.1@114.85,90 114.85,87.825 C25.1@114.825,87.8 114.876,87.749 114.876,86.963 114.31,86.396 113.8,86.396
XTAL1_IN: C30.2 IC3.22 Y3.1 | length 8.6
  Top Copper w0.2: C30.2@119.125,95.9 120.8,95.9 Y3.1@120.9,95.8 121.384,96.284 121.694,96.284 121.997,96.588 121.997,98.592 121.325,99.264 IC3.22@121.325,101.687
XTAL1_OUT: C31.2 IC3.23 Y3.3 | length 6.5
  Top Copper w0.2: IC3.23@121.825,101.687 121.825,100.275 123.111,98.989 123.111,97.611 Y3.3@123.1,97.6 123.375,97.325 C31.2@124.9,97.325
XTAL2_IN: C13.1 IC2.4 Y1.1 | length 9.3
  Top Copper w0.2: C13.1@91.668,100.218 91.668,101.532 Y1.1@91.3,101.9 91.4,101.9 92.3,102.8 94.6,102.8 94.93,102.47 94.93,101.07 95.45,100.55 IC2.4@96.6,100.55
XTAL2_OUT: C11.1 IC2.3 Y1.3 | length 6.9
  Top Copper w0.2: C11.1@93.075,105.3 93.075,104.125 Y1.3@93.5,103.7 95,103.7 95.6,103.1 95.6,101.5 96.05,101.05 IC2.3@96.6,101.05
XTAL3_IN: C22.2 U1.5 Y2.3 | length 5.6
  Bottom Copper w0.2: C22.2@84.175,88.5 84.175,90.175 Y2.3@84.4,90.4 ; Y2.3@84.6,90.34 85,90.74 U1.5@88.09,90.74
XTAL3_OUT: C23.2 U1.6 Y2.1 | length 7.7
  Bottom Copper w0.2: Y2.1@82.2,92.2 82.225,92.2 82.725,92.7 C23.2@82.725,93.7 ; Y2.1@82.4,92 83.15,91.25 U1.6@88.1,91.25
pads on no net: IC2.2 IC2.21 IC2.22 IC2.23 IC2.24 IC3.2 IC3.3 IC4.11 IC4.12 IC5.2 IC5.3 IC5.4 IC5.6 IC6.2 IC6.6 IC7.2 IC7.6 IC8.2 IC8.6 IC9.2 IC9.6 IC10.2 IC10.6 IC11.2 IC11.6 IC12.2 IC12.6 J1.CD1 J1.MH1 J1.MH2 J2. J2.1 J2.2 J2.3 J2.4 J2.A6 J2.A7 J2.A8 J2.B6 J2.B7 J2.B8 J3. J3.1 J3.2 J3.3 J3.4 J3.A8 J3.B8 J4. J4.1 J4.2 J4.3 J4.4 J4.A8 J4.B8 J5. J5.1 J5.2 J5.3 J5.4 J5.A8 J5.B8 J6. J6.1 J6.2 J6.3 J6.4 J6.A8 J6.B8 J7.5 J7.6 J8.5 J8.6 J9.5 J9.6 S1.MH1 S1.MH2 S2.MH1 S2.MH2 ST1.1 ST2.1 ST3.1 ST4.1 U1.2 U1.3 U1.4 U1.10 U1.11 U1.12 U1.13 U1.14 U1.17 U1.19 U1.20 U1.21 U1.22 U1.28 U1.29 U1.31 U1.38 U1.40 U1.41 U1.42 U1.43 U1.45 U1.46 U2.11 U2.12 U2.14 U2.15 U2.16 U3.11 U3.12 U3.14 U3.15 U3.16

## Polygon pours and split planes (outlines as drawn)
+VCARD on Top Copper "+VCARD_L01_P137" (solid, pour order 137): 69.7,100.7 63.7,100.7 63.7,96.5 69.6,96.5 71.2,94.9 77,94.9 77.8,95.7 77.8,100.5 79.4,100.5 79.4,95.5 77.8,93.9 70.5,93.9 68.9,95.5 62.4,95.5 62.4,101.4 62.5,101.5 69.7,101.5 69.7,100.8
+5V on Top Copper "+5V_L01_P136" (solid, pour order 136): 116.068,105.327 112.1,105.327 112.1,104.3 114,104.3 114,104.9 114.134,105.034 116.068,105.028
+5V on Top Copper "+5V_L01_P135" (solid, pour order 135): 145.3,117.8 147.5,117.8 147.5,116.2 145.3,116.2
+5V on Top Copper "+5V_L01_P134" (solid, pour order 134): 133.5,116.8 133.525,116.825 135.525,116.825 136.2,117.5 137.6,117.5 137.6,116.1 133.5,116.1
+5V on Top Copper "+5V_L01_P133" (solid, pour order 133): 120,117.177 120,116.5 123.5,116.5 123.5,117.4 122,117.4 121.777,117.177
+5V on Top Copper "+5V_L01_P128" (solid, pour order 128): 88.4,114.2 88.4,114.9 89.25,114.9 89.25,117.1 91,117.1 91,114.2
+5V on Top Copper "+5V_L01_P127" (solid, pour order 127): 70.85,114.55 70.85,115.3 72.9,115.3 72.9,117.2 74.4,117.2 74.4,114.55
+5V on Top Copper "+5V_L01_P132" (solid, pour order 132): 107.8,114.3 107.8,117.4 106.6,117.4 106.6,115.2 105.9,115.2 105.9,114.3
+5V_PORT6 on Top Copper "+5V_PORT6_L01_P123" (solid, pour order 123): 131.8,116.214 131.8,118.05 130.8,118.05 130.8,116.214
+5V_PORT7 on Top Copper "+5V_PORT7_L01_P122" (solid, pour order 122): 117.4,116.6 118.4,116.6 118.4,118.1 117.4,118.1
+5V_PORT4 on Top Copper "+5V_PORT4_L01_P119" (solid, pour order 119): 100.9,117.1 103.1,117.1 103.1,116.3 100.9,116.3
+5V_PORT2 on Top Copper "+5V_PORT2_L01_P118" (solid, pour order 118): 66.1,117.2 66.1,116.3 68.3,116.3 68.3,117.2
+5V_PORT3 on Top Copper "+5V_PORT3_L01_P117" (solid, pour order 117): 83.5,117.3 85.7,117.3 85.7,116.5 83.5,116.5
GND on Top Copper "GND_L01_P116" (solid, pour order 116): 126.4,124.5 126.4,117.9 123.5,117.9 123.5,123.7 125.8,123.7 125.8,124.5
GND on Top Copper "GND_L01_P115" (solid, pour order 115): 140.3,124.5 140.3,117.8 137.2,117.8 137.2,123.5 139.7,123.5 139.7,124.5
GND on Top Copper "GND_L01_P114" (solid, pour order 114): 112.6,124.5 112.6,121.7 112,121.1 112,118 109.7,118 109.7,124 112,124 112,124.5
+5V_PORT7 on Top Copper "+5V_PORT7_L01_P113" (solid, pour order 113): 112.8,124.5 113.4,124.5 113.4,122.7 114.2,122.7 114.2,121.3 112.8,121.3
+5V_PORT5 on Top Copper "+5V_PORT5_L01_P110" (solid, pour order 110): 140.5,124.5 140.5,121.3 141.8,121.3 141.8,123 141.1,123 141.1,124.5
+5V_PORT7 on Top Copper "+5V_PORT7_L01_P112" (solid, pour order 112): 118.2,124.5 118.2,121.4 118.5,121.1 118.5,119.4 118.4,119.3 118.4,117.8 115.6,117.8 115.6,118.9 117.4,118.9 117.4,121.3 115.9,121.3 115.9,122.7 117.6,122.7 117.6,124.5
GND on Top Copper "GND_L01_P111" (solid, pour order 111): 118.4,124.475 118.4,121.675 118.9,121.175 118.9,117.9 121.5,117.9 121.5,123.625 119,123.625 119,124.475
GND on Top Copper "GND_L01_P109" (solid, pour order 109): 146.1,124.5 146.1,122.7 146.5,122.3 146.5,118.75 150.1,118.75 150.1,123.9 146.7,123.9 146.7,124.5
+5V_PORT5 on Top Copper "+5V_PORT5_L01_P108" (solid, pour order 108): 142.8,116.9 143.3,116.9 143.3,118.8 144.3,118.8 144.3,116.2 142.8,116.2
+5V_PORT5 on Top Copper "+5V_PORT5_L01_P107" (solid, pour order 107): 145.9,124.5 145.9,122.4 146.2,122.1 146.2,118.2 143.3,118.2 143.3,118.9 145.1,118.9 145.1,121.4 143.6,121.4 143.6,122.7 145.3,122.7 145.3,124.5
+5V_PORT6 on Top Copper "+5V_PORT6_L01_P106" (solid, pour order 106): 129.5,118.8 129.5,117.8 132.1,117.8 132.1,119.9 131.2,119.9 131.2,118.8
+5V_PORT6 on Top Copper "+5V_PORT6_L01_P105" (solid, pour order 105): 126.6,124.5 126.6,121.1 128.1,121.1 128.1,122.7 127.2,122.7 127.2,124.5
+5V_PORT6 on Top Copper "+5V_PORT6_L01_P104" (solid, pour order 104): 132,124.5 132,122.6 132.5,122.1 132.5,119.6 131.2,119.6 131.2,121.1 129.9,121.1 129.9,122.6 131.4,122.6 131.4,124.5 131.4,123.2 131.4,124.5
GND on Top Copper "GND_L01_P102" (solid, pour order 102): 132.2,124.5 132.2,122.7 132.7,122.2 132.7,117.8 135.5,117.8 135.5,123.5 134.3,123.5 134.3,124.5
+5V_PORT2 on Top Copper "+5V_PORT2_L01_P097" (solid, pour order 97): 67.9,123 67.9,114.4 69.6,114.4 69.6,120.3 70.1,120.3 70.1,123
+5V_PORT3 on Top Copper "+5V_PORT3_L01_P096" (solid, pour order 96): 85.3,122.7 85.3,114.1 87,114.1 87,120 87.5,120 87.5,122.7
+5V_PORT4 on Top Copper "+5V_PORT4_L01_P095" (solid, pour order 95): 102.7,122.9 102.7,114.3 104.4,114.3 104.4,120.2 104.9,120.2 104.9,122.9
GND on Top Copper "GND_L01_P094" (solid, pour order 94): 145.4,91.5 138.2,91.5 138.2,87.5 145.4,87.5
GND on Top Copper "GND_L01_P093" (solid, pour order 93): 139.9,97.3 139.9,101.6 145.787,101.6 145.737,97.3
+5V on Top Copper "+5V_L01_P092" (solid, pour order 92): 138,97.08 141.6,97.08 141.6,96.4 138,96.4
+5V on Top Copper "+5V_L01_P091" (solid, pour order 91): 145.4,91.7 139.8,91.7 139.8,97.08 145.4,97.08 145.4,96.5 143.9,96.5 143.9,92.3 145.4,92.3
GND on Top Copper "GND_L01_P090" (solid, pour order 90): 140.9,108.4 140.3,108.4 140.3,111.2 140.9,111.2
GND on Top Copper "GND_L01_P089" (solid, pour order 89): 145.8,110.2 137.2,110.2 137.2,113.6 145.8,113.6
+5V_UPSTREAM on Top Copper "+5V_UPSTREAM_L01_P084" (solid, pour order 84): 143.8,104.6 143.8,106.1 142.7,106.1 142.7,104.6
+5V_UPSTREAM on Top Copper "+5V_UPSTREAM_L01_P087" (solid, pour order 87): 145.4,110 142.7,110 142.7,108.7 143.8,108.7 143.8,109.4 145.4,109.4
GND on Top Copper "GND_L01_P086" (solid, pour order 86): 145.825,104.4 142.5,104.4 142.5,104.155 137.2,104.155 137.2,100.8 145.2,100.8 145.789,101.389
+5V_UPSTREAM on Top Copper "+5V_UPSTREAM_L01_P085" (solid, pour order 85): 145.4,105.2 142.1,105.2 142.1,105.4 140,105.4 140,107.3 138.9,107.3 138.9,104.3 142.2,104.3 142.2,104.6 145.4,104.6
+5V on Bottom Copper "+5V_L04_P138" (solid, pour order 138): 141.5,96.25 141.5,92.5 148.829,92.5 148.829,113.171 147.5,114.5 147.5,118.425 135.75,118.425 135.75,116 145.3,116 145.3,113.7 147,112 147,96.25
GND on Bottom Copper "GND_L04_P147" (solid, pour order 147): 126.5,101.6 126.5,104.2 139,104.2 139,101.6
+3V3 on Bottom Copper "+3V3_L04_P146" (solid, pour order 146): 101.3,96.5 101.3,95.2 100.5,94.4 100.5,84.2 102.5,84.2 102.5,96.5
FE2.1_VD33 on Bottom Copper "FE2.1_VD33_L04_P120" (solid, pour order 120): 124.3,109 123.2,109 123.2,109.8 119.7,109.8 119.7,108.3 118.6,108.3 118.6,102.3 118.6,102.2 118.5,102.2 118.2,102.2 118.2,101.2 121,101.2 121,103.5 122,103.5 122,107.4 120.9,107.4 120.9,103.9 119.341,103.9 119.341,107.6 124.3,107.6
+5V on Bottom Copper "+5V_L04_P145" (solid, pour order 145): 115.8,105.5 111.7,105.5 107.3,101.1 101.2,101.1 101.2,104.9 100.1,104.9 100.1,100 108.1,100 112.3,104.2 115.8,104.2
+5V on Bottom Copper "+5V_L04_P144" (solid, pour order 144): 130.4,98.5 130.4,95.2 105.1,95.2 105.1,94.2 131.2,94.2 131.2,96.9 133.7,96.9 133.7,98.5
+3V3 on Bottom Copper "+3V3_L04_P143" (solid, pour order 143): 129.3,101 129.3,96.5 101.6,96.5 101.6,95.5 130.1,95.5 130.1,99.25 132.7,99.25 132.7,101
GND on Bottom Copper "GND_L04_P142" (solid, pour order 142): 128.9,106 128.9,96.9 126,96.9 126,102.5 126,96.5 126,106
+3V3 on Bottom Copper "+3V3_L04_P141" (solid, pour order 141): 136.75,99.25 131.5,99.25 131.5,101 136.75,101 136.75,100.5
+5V on Bottom Copper "+5V_L04_P140" (solid, pour order 140): 144.25,96.25 144.25,92.5 140,92.5 140,94.3 132.75,94.3 132.75,98.5 135.5,98.5 136.25,97.75 137.75,96.25
+5V on Bottom Copper "+5V_L04_P139" (solid, pour order 139): 73,115.25 107.75,115.25 107.75,117.5 73,117.5
+3V3 on Bottom Copper "+3V3_L04_P131" (solid, pour order 131): 97.2,88.9 93.875,88.925 93.8,89 92,90.7 91.7,90.4 92.3,89.8 93.461,88.639 97.2,88.639
+3V3 on Bottom Copper "+3V3_L04_P130" (solid, pour order 130): 95.1,95.4 95.1,94.4 93.9,93.2 93.9,89.5 90.3,89.5 90.3,90.3 90.3,90.6 91.4,90.6 91.8,90.9 91.8,92.295 93.399,93.8 94.8,94.5 94.8,95.4
+3V3 on Bottom Copper "+3V3_L04_P129" (solid, pour order 129): 88,92.9 89,92.9 89,93.8 90.7,93.8 90.7,92.9 90.9,92.7 90.9,91.6 90.6,91.3 90.6,89.9 90,89.3 89.6,88.9 89.6,87.2 89.2,87.2 89.2,88.4 89,88.6 87.3,88.6 87.3,88.9 89.1,88.9 89.3,89.1 89.3,89.4 90,90.1 90,91.5 90.4,91.9 90.4,92.6 90.2,92.8 89.4,92.8 89.2,92.6 88,92.6
+5V_PORT7 on Bottom Copper "+5V_PORT7_L04_P126" (solid, pour order 126): 112.8,122.7 117.7,122.7 117.7,121.2 112.8,121.2
+5V_PORT5 on Bottom Copper "+5V_PORT5_L04_P125" (solid, pour order 125): 140.5,122.9 145.2,122.9 145.2,121.4 145.1,121.3 140.5,121.3
+5V_PORT6 on Bottom Copper "+5V_PORT6_L04_P124" (solid, pour order 124): 126.6,122.7 126.6,121.1 131.5,121.1 131.5,122.7
FE2.1_VD33 on Bottom Copper "FE2.1_VD33_L04_P121" (solid, pour order 121): 116.95,106.3 119.25,106.3 119.25,105.373 116.95,105.373
+5V_UPSTREAM on Bottom Copper "+5V_UPSTREAM_L04_P088" (solid, pour order 88): 143.8,105.2 142.7,105.2 142.7,109.5 143.8,109.5
GND on Signal Layer 1 "GND_L02_P098" (solid, pour order 98): 53.8,131.5 53.8,81.5 152.7,81.5 152.7,131.5
+3V3 on Signal Layer 2 "+3V3_L03_P099" (solid, pour order 99): 105.1,96.5 105.1,95.5 93.9,95.5 93.9,89.5 92.1,89.5 92.1,96.4 92.2,96.5
+5V on Signal Layer 2 "+5V_L03_P101" (solid, pour order 101): 112,105.5 112,104 116,104 116,108.6 118.25,108.6 118.25,116.25 117,116.25 117,109.6 115,109.6 115,105.5
+5V on Signal Layer 2 "+5V_L03_P100" (solid, pour order 100): 106.5,115.25 106.5,118.175 137.75,118.175 137.75,116 108.5,116 108.5,115.25
GND on Signal Layer 2 "GND_L03_P103" (solid, pour order 103): 53.8,81.5 53.8,131.5 152.7,131.5 152.7,81.5

## Silkscreen, mask and mechanical layers (free items; w line width, h text height)
Top Overlay:
  circle w0.3: c106.4,100.9 r0.141
  circle w0.3: c100.641,92.3 r0.141
  circle w0.3: c119.8,92.3 r0.141
  circle w0.26: c72.75,90.75 r0.124
  lines w0.17: 60.75,88.25 60.75,90.25 62.75,90.25 72.25,90.25 72.25,86.5 60.75,86.5 60.75,88.342 72.135,88.342 72.217,88.342 ; 64.75,86.5 64.75,90.25 ; 68.5,86.5 68.5,90.25 ; 84.475,84.775 88.175,84.775 ; 84.475,84.775 84.475,86.475 ; 84.475,84.775 80.775,84.775 80.775,86.475 84.475,86.475 ; 84.475,84.775 84.475,86.475 ; 84.475,86.475 88.175,86.475 ; 88.175,84.775 88.175,86.475 ; 88.175,84.775 91.875,84.775 91.875,86.475 88.175,86.475 ; 88.175,84.775 88.175,86.475 ; 73.375,84.775 77.075,84.775 77.075,86.475 73.375,86.475 73.375,84.775 ; 77.05,84.775 80.75,84.775 80.75,86.475 77.05,86.475 77.05,84.775 ; 107,95.7 110.75,95.7 110.75,97.425 107,97.425 107,95.7 ; 107,97.4 110.75,97.4 110.75,99.125 107,99.125 107,97.4 ; 107,99.1 110.75,99.1 110.75,100.825 107,100.825 107,99.1 ; 110.8,95.7 114.55,95.7 114.55,97.425 110.8,97.425 110.8,95.7 ; 110.8,97.4 114.55,97.4 114.55,99.125 110.8,99.125 110.8,97.4 ; 110.8,99.1 114.55,99.1 114.55,100.825 110.8,100.825 110.8,99.1
  text "PORT6" at 126.02,118.007 h1.1 r90
  text "PORT5" at 139.82,118.007 h1.1 r90
  text "PORT7" at 112.32,117.907 h1.1 r90
  text "PORT4" at 97.32,115.054 h1.1 r90
  text "PORT3" at 79.92,114.907 h1.1 r90
  text "PORT2" at 62.62,114.607 h1.1 r90
  text "HUB1" at 117.818,111.68 h1.1
  text "PWR" at 140.774,110.48 h1.1
  text "SD Slot" at 63.573,109.18 h1.1
  text "SD Bridge" at 77.78,105.797 h1.1
  text "HUB2" at 96.687,103.93 h1.1
  text "UART Pins" at 106.48,101.58 h1.1
  text "GND" at 107.343,99.407 h1.1
  text "RTS" at 111.28,99.419 h1.1
  text "5V" at 107.977,97.707 h1.1
  text "TX" at 111.754,97.707 h1.1
  text "DATA" at 139.997,97.58 h1.1
  text "3V3" at 107.54,96.007 h1.1
  text "RX" at 111.683,96.007 h1.1
  text "UART2" at 104.637,92.706 h1.1
  text "UART1" at 120.388,92.399 h1.1
  text "Board SWD" at 62.119,90.78 h1.1
  text "GND" at 61.243,88.76 h1.1
  text "RST" at 65.183,88.76 h1.1
  text "3V3" at 69.047,88.724 h1.1
  text "STLINK ISP" at 78.225,87.08 h1.1
  text "DIO" at 61.5,86.861 h1.1
  text "SWO" at 68.892,86.869 h1.1
  text "CLK" at 65.145,86.852 h1.1
  text "GND" at 73.663,85.066 h1.1
  text "RST" at 77.509,85.066 h1.1
  text "SWO" at 81.113,85.066 h1.1
  text "CLK" at 84.876,85.066 h1.1
  text "DIO" at 88.796,85.066 h1.1
  text "5V" at 105.581,82.18 h1.1
  text "3V3" at 117.894,82.18 h1.1
  text "5V" at 125.081,82.18 h1.1
  text "3V3" at 137.394,82.18 h1.1
Bottom Overlay:
  drawing of 9 lines, arcs and shapes, not listed
  text "USB 2.0 High Speed Hub" at 147.844,118.68 h1.8
  text "STLINK" at 94.986,96.93 h1.1
Mechanical 13:
  text "PORT5" at 139.704,131.779 h1.52
  text "PORT2" at 61.354,131.754 h1.52
  text "PORT3" at 79.454,131.754 h1.52
  text "PORT4" at 96.754,131.754 h1.52
  text "PORT7" at 112.054,131.754 h1.52
  text "PORT6" at 125.929,131.704 h1.52
  text "PORT4" at 94.654,107.754 h1.52
  text "PORT11" at 78.054,105.679 h1.52
  text "PORT9" at 109.729,86.379 h1.52
  text "PORT8" at 128.054,86.029 h1.52
  text "PORT10" at 82.604,85.729 h1.52